# EAGLE board Ingenious Waasa-Trug (EAGLE 9.7.0)

Size 223.79 x 145.76 mm. Coordinates in mm from the lower left corner, seen from the top.
Outline: 0,0 223.79,0 223.79,145.76 0,145.76 0,0
Copper layers (1*16): Top 0.035mm / dielectric 1.5mm / Bottom 0.035mm
Design rules "default": minimum track width 6mil, minimum drill 0.35mm, track to track 6mil, track to pad 6mil, pad to pad 6mil, via to via 6mil, smd to smd 6mil, copper to edge 40mil, drill to drill 6mil, minimum pad ring 10mil, minimum via ring 8mil, stop-mask expansion 4mil, vias tented up to drill 0mil, thermal gap 10mil

## Footprints (pad centres in the part's own frame; a part is rotated, then mirrored left to right if it is on the bottom)
SG90 = drill 1.016 long: 1 -2.54,0; 2 0,0; 3 2.54,0
ARDUINO-UNO-R3-SHIELD = drill 1.016 pad 1.88: 3.3V 24.13,-2.54; 5V 24.13,0; A0 24.13,12.7; A1 24.13,15.24; A2 24.13,17.78; A3 24.13,20.32; A4 24.13,22.86; A5 24.13,25.4; AREF -24.13,-13.97; D2 -24.13,20.32; D3 -24.13,17.78; D4 -24.13,15.24; D5 -24.13,12.7; D6 -24.13,10.16; D7 -24.13,7.62; D8 -24.13,3.81; D9 -24.13,1.27; D10 -24.13,-1.27; D11 -24.13,-3.81; D12 -24.13,-6.35; D13 -24.13,-8.89; GND@0 24.13,2.54; GND@1 24.13,5.08; GND@2 -24.13,-11.43; IOREF 24.13,-7.62; NC 24.13,-10.16; RES 24.13,-5.08; RX -24.13,25.4; SCL -24.13,-19.05; SDA -24.13,-16.51; TX -24.13,22.86; VIN 24.13,7.62

## Placement (x,y rotation side)
SERVO1  SERVOSG90  [SG90]  169.87,66.9 0 top
SERVO2  SERVOSG90  [SG90]  193.82,67.06 0 top
SERVO3  SERVOSG90  [SG90]  216.81,66.81 0 top
SERVO4  SERVOSG90  [SG90]  49.48,71.61 0 top
SERVO5  SERVOSG90  [SG90]  27.74,72.11 0 top
SERVO6  SERVOSG90  [SG90]  7.54,72.87 0 top
SERVO7  SERVOSG90  [SG90]  170.25,12.83 0 top
SERVO8  SERVOSG90  [SG90]  189.24,12.08 0 top
SERVO9  SERVOSG90  [SG90]  211.24,10.58 0 top
SERVO10  SERVOSG90  [SG90]  7.06,7.57 0 top
SERVO11  SERVOSG90  [SG90]  24.83,7.18 0 top
SERVO12  SERVOSG90  [SG90]  43.5,6.99 0 top
U3  ARDUINO-UNO-R3-SHIELD  [ARDUINO-UNO-R3-SHIELD]  123.94,115.91 270 top

## Library data of the parts
SERVO1-SERVO12 U3 = Tinkercad

## Nets
U3_5V: SERVO1.2 SERVO2.2 SERVO3.2 SERVO4.2 SERVO5.2 SERVO6.2 SERVO7.2 SERVO8.2 SERVO9.2 SERVO10.2 SERVO11.2 SERVO12.2 U3.5V
U3_D2: SERVO12.3 U3.D2
U3_D3: SERVO11.3 U3.D3
U3_D4: SERVO10.3 U3.D4
U3_D5: SERVO9.3 U3.D5
U3_D6: SERVO8.3 U3.D6
U3_D7: SERVO7.3 U3.D7
U3_D8: SERVO3.3 U3.D8
U3_D9: SERVO2.3 U3.D9
U3_D10: SERVO1.3 U3.D10
U3_D11: SERVO4.3 U3.D11
U3_D12: SERVO5.3 U3.D12
U3_D13: SERVO6.3 U3.D13
U3_GND: SERVO1.1 SERVO2.1 SERVO3.1 SERVO4.1 SERVO5.1 SERVO6.1 SERVO7.1 SERVO8.1 SERVO9.1 SERVO10.1 SERVO11.1 SERVO12.1 U3.GND@0 U3.GND@1 U3.GND@2

## Tracks (layer width: path | path; a pad name or v marks a point on that pad's centre or on a via)
U3_5V  (12 unrouted)
U3_D2  (1 unrouted)
U3_D3  (1 unrouted)
U3_D4  (1 unrouted)
U3_D5  (1 unrouted)
U3_D6  (1 unrouted)
U3_D7  (1 unrouted)
U3_D8  (1 unrouted)
U3_D9  (1 unrouted)
U3_D10  (1 unrouted)
U3_D11  (1 unrouted)
U3_D12  (1 unrouted)
U3_D13  (1 unrouted)
U3_GND  (14 unrouted)